# EAGLE board UsbParMarkerV3 v22 (EAGLE 9.7.0)
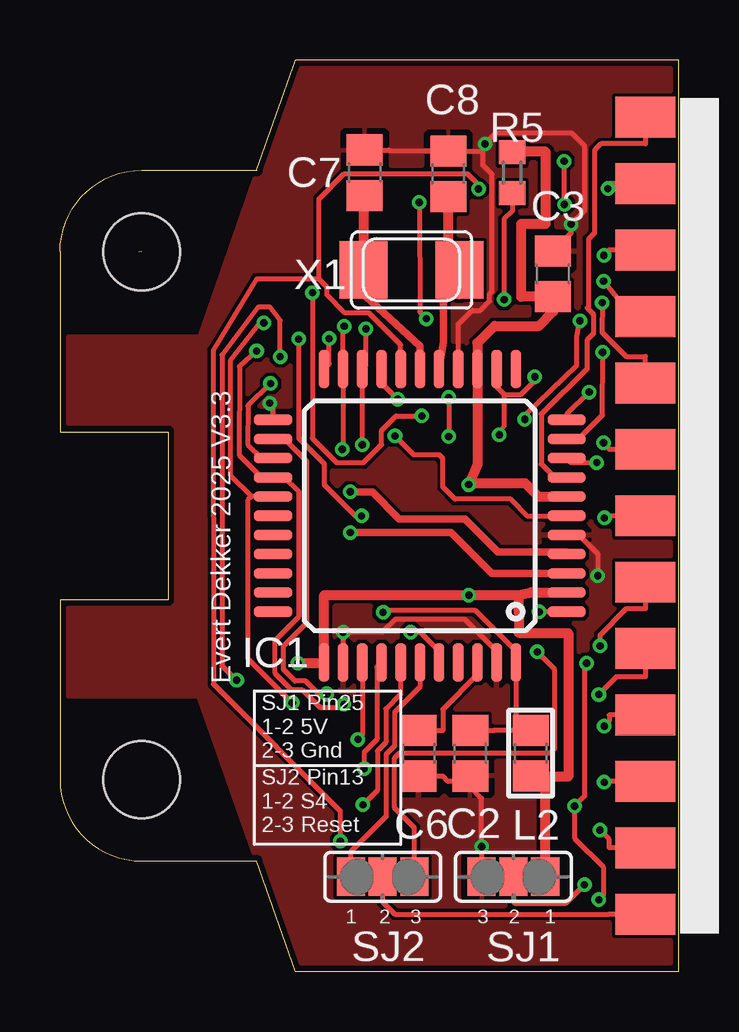
[diagram p0: board, top side]
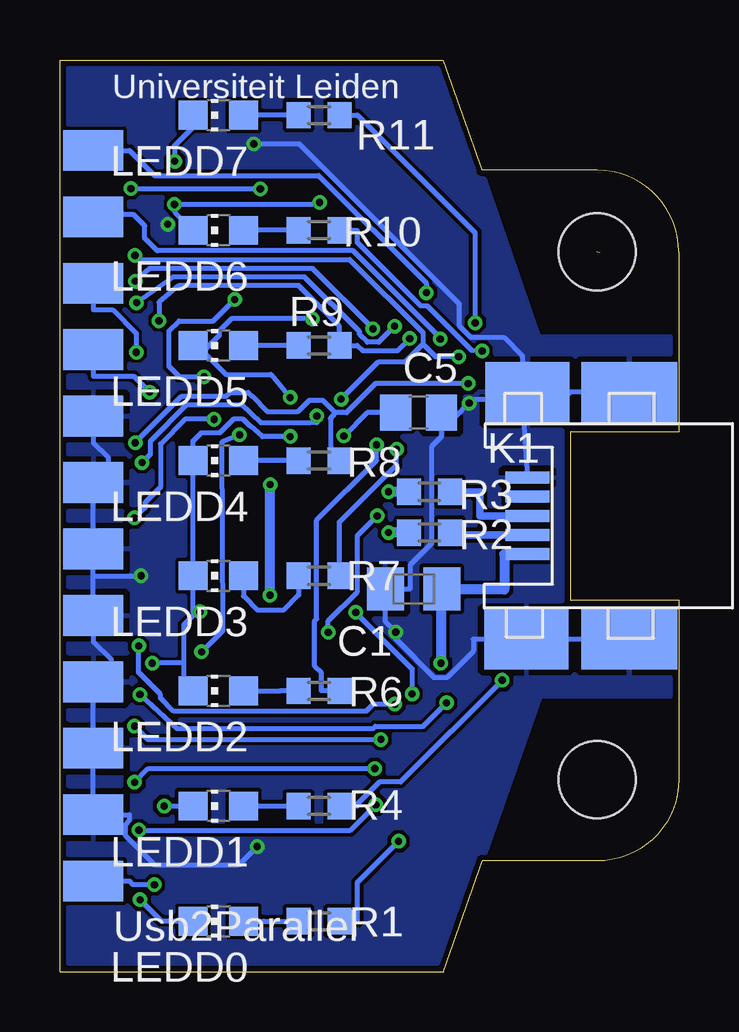
[diagram p1: board, bottom side, seen from below]

Size 25.8 x 38 mm. Coordinates in mm from the lower left corner, seen from the top.
Outline: 9.81,0 25.8,0 25.8,38 9.81,38 8.2,33.41
Outline: 9.81,0 9.8,0
Outline: 3.41,30 3.29,30
Outline: 8.2,33.41 3.41,33.41 arc90 0,30 0,22.5 4.52,22.5 4.52,15.5 0,15.5 0,11.5 0,11.5 0,8.01 arc90 3.4,4.61 8.2,4.61 9.81,0
Outline: 8.2,33.41 8.21,33.41
Copper layers (1*16): Top / Bottom
Stack-up Default Layer Stack: Top User Defined 0.035mm / Dielectric-1 User Defined 1.6mm / Bottom User Defined 0.035mm
Design rules: minimum copper width class=1 14mil, minimum copper width class=2 12mil, minimum copper width class=0 8mil, minimum copper width 6mil, minimum drill size 0.299996875mm, copper clearance class=1 to class=1 8mil, copper clearance class=2 to class=2 8mil, copper clearance via to via 8mil, copper clearance wire_polygon to wire_polygon 6mil, copper clearance wire_polygon to pad_smd 6mil, copper clearance wire_polygon to via 6mil, copper clearance pad_smd to pad_smd 6mil, copper clearance pad_smd to via 6mil, copper clearance smd to pad (same net) 0mil, copper clearance smd to via (same net) 0mil, copper clearance smd to smd (same net) 0mil, dimension clearance 10mil, via restrict clearance 0mil, drill distance 10mil, keepout clearance 0mil
Net classes: 0 default: width 0.203 mm; 1 RowCols: width 0.356 mm, clearance 0.203 mm; 2 Vcc: width 0.305 mm, clearance 0.203 mm
Holes 3.2 mm at 3.41,8 3.41,30

## Footprints (pad centres in the part's own frame; a part is rotated, then mirrored left to right if it is on the bottom)
R/2012-12R = smd 1.55 x 1.8: + 1.175,0; - -1.175,0
C0805 = smd 1.3 x 1.5: 1 -0.95,0; 2 0.95,0
TQFP44-PAD = smd 1.6 x 0.45: 1 -6.117,4; 2 -6.117,3.2; 3 -6.117,2.4; 4 -6.117,1.6; 5 -6.117,0.8; 6 -6.117,0; 7 -6.117,-0.8; 8 -6.117,-1.6; 9 -6.117,-2.4; 10 -6.117,-3.2; 11 -6.117,-4; 23 6.117,-4; 24 6.117,-3.2; 25 6.117,-2.4; 26 6.117,-1.6; 27 6.117,-0.8; 28 6.117,0; 29 6.117,0.8; 30 6.117,1.6; 31 6.117,2.4; 32 6.117,3.2; 33 6.117,4 | smd 0.45 x 1.6: 12 -4,-6.117; 13 -3.2,-6.117; 14 -2.4,-6.117; 15 -1.6,-6.117; 16 -0.8,-6.117; 17 0,-6.117; 18 0.8,-6.117; 19 1.6,-6.117; 20 2.4,-6.117; 21 3.2,-6.117; 22 4,-6.117; 34 4,6.117; 35 3.2,6.117; 36 2.4,6.117; 37 1.6,6.117; 38 0.8,6.117; 39 0,6.117; 40 -0.8,6.117; 41 -1.6,6.117; 42 -2.4,6.117; 43 -3.2,6.117; 44 -4,6.117
MINIUSB = smd 0.5 x 1.85: 1 -1.6,3.81; 2 -0.8,3.81; 3 0,3.81; 4 0.8,3.81; 5 1.6,3.81 | smd 2.5 x 3.5: 11 -5.15,3.86; 13 5.15,3.81 | smd 2.5 x 4: 12 -5.15,-0.44; 14 5.15,-0.44
F25K = smd 1.7 x 2.5: 1 -16.612,-1.75; 2 -13.843,-1.75; 3 -11.074,-1.75; 4 -8.306,-1.75; 5 -5.537,-1.75; 6 -2.769,-1.75; 7 0,-1.75; 8 2.769,-1.75; 9 5.537,-1.75; 10 8.306,-1.75; 11 11.074,-1.75; 12 13.843,-1.75; 13 16.612,-1.75 | smd 1.7 x 2.5 bottom: 14 -15.227,-1.75; 15 -12.459,-1.75; 16 -9.69,-1.75; 17 -6.921,-1.75; 18 -4.153,-1.75; 19 -1.384,-1.75; 20 1.384,-1.75; 21 4.153,-1.75; 22 6.921,-1.75; 23 9.69,-1.75; 24 12.459,-1.75; 25 15.227,-1.75
0805 = smd 1.3 x 1.5: 1 -0.95,0; 2 0.95,0
CHIP-LED0805 = smd 1.2 x 1.2: A 0,-1.05; C 0,1.05
R0603 = smd 1 x 1.1: 1 -0.85,0; 2 0.85,0
SJ3P = smd 1.168 x 1.6: 1 -1.324,0; 2 0,0; 3 1.324,0
NX5032 = smd 2 x 2.4: P$1 2,0; P$2 -2,0

## Placement (x,y rotation side)
C1  10uF  [R/2012-12R]  11.05,15.95 0 bottom
C2  100N  [C0805]  17.11,9.1 270 top
C3  100n  [C0805]  20.56,29.08 270 top
C5  1uF  [C0805]  10.86,23.3 0 bottom
C6  100N  [C0805]  14.96,9.1 270 top
C7  22p  [C0805]  12.71,33.3 90 top
C8  22p  [C0805]  16.19,33.25 90 top
IC1  ATMEGA32U4-XUAU  [TQFP44-PAD]  15,19 180 top
K1  USBMINIB  [MINIUSB]  2.5,19 90 bottom
K2  F25K  [F25K]  26.16,19 270 top
L2  10uH  [0805]  19.63,9.11 270 top
LEDD0  KPTD-2012LVZGCK  [CHIP-LED0805]  19.2,2.1 90 bottom
LEDD1  KPTD-2012LVZGCK  [CHIP-LED0805]  19.2,6.9 90 bottom
LEDD2  KPTD-2012LVZGCK  [CHIP-LED0805]  19.2,11.7 90 bottom
LEDD3  KPTD-2012LVZGCK  [CHIP-LED0805]  19.2,16.5 90 bottom
LEDD4  KPTD-2012LVZGCK  [CHIP-LED0805]  19.2,21.3 90 bottom
LEDD5  KPTD-2012LVZGCK  [CHIP-LED0805]  19.2,26.1 90 bottom
LEDD6  KPTD-2012LVZGCK  [CHIP-LED0805]  19.2,30.9 90 bottom
LEDD7  KPTD-2012LVZGCK  [CHIP-LED0805]  19.2,35.7 90 bottom
R1  2K2  [R0603]  15,2.1 180 bottom
R2  22  [R0603]  10.4,18.3 180 bottom
R3  22  [R0603]  10.4,20 180 bottom
R4  2K2  [R0603]  15,6.9 180 bottom
R5  10K  [R0603]  18.86,33.3 90 top
R6  2K2  [R0603]  15,11.7 180 bottom
R7  2K2  [R0603]  15,16.5 180 bottom
R8  2K2  [R0603]  15,21.3 180 bottom
R9  2K2  [R0603]  15,26.1 180 bottom
R10  2K2  [R0603]  15,30.9 180 bottom
R11  2K2  [R0603]  15,35.7 180 bottom
SJ1  [SJ3P]  18.91,3.95 180 top
SJ2  [SJ3P]  13.46,3.95 0 top
X1  16Mhz  [NX5032]  14.65,29.25 180 top

## Library data of the parts
C1-C3 C5 C6 = rcl; SPICEPREFIX: C
C7 C8 = rcl; FARNELL: 1759489; SPICEPREFIX: C
IC1 = SmartPrj; RS: 715-3805
K1 = Mini_usb; LCSC: SOFNG CZ-519
K2 SJ1 SJ2 = hs-ul
L2 = microbuilder; FARNELL: 2215650
LEDD0 LEDD1-LEDD7 = LedKingbright; FARNELL: 2846598
R1-R11 = rcl; SPICEPREFIX: R
X1 = adafruit; FARNELL: 2467791

## Nets
+5V [Vcc]: C1.+ C3.2 IC1.2 IC1.7 IC1.14 IC1.34 K1.1 L2.2 R5.2 SJ1.1
D0: IC1.18 K2.2 R1.1
D1: IC1.19 K2.3 R4.1
D2: IC1.20 K2.4 R6.1
D3: IC1.21 K2.5 R7.1
D4: IC1.25 K2.6 R8.1
D5: IC1.22 K2.7 R9.1
D6: IC1.26 K2.8 R10.1
D7: IC1.27 K2.9 R11.1
GND: C1.- C2.2 C3.1 C5.2 C6.2 C7.2 C8.2 IC1.5 IC1.15 IC1.23 IC1.35 IC1.43 K1.5 K1.11 K1.12 K1.13 K1.14 K2.18 K2.19 K2.20 K2.21 K2.22 K2.23 K2.24 SJ1.3
LEDCC: IC1.1 LEDD0.C LEDD1.C LEDD2.C LEDD3.C LEDD4.C LEDD5.C LEDD6.C LEDD7.C
N$1: K1.2 R2.1
N$2: K1.3 R3.1
N$3: K2.13 SJ2.2
N$4: IC1.36 K2.10
N$6: C2.1 IC1.24 IC1.44 L2.1
N$7: LEDD0.A R1.2
N$8: LEDD1.A R4.2
N$16: IC1.8 K2.1
N$17: IC1.39 SJ2.1
N$18: IC1.38 K2.12
N$19: IC1.37 K2.11
N$20: LEDD2.A R6.2
N$21: IC1.9 K2.14
N$22: IC1.10 K2.16
N$23: IC1.11 K2.17
N$24: IC1.40 K2.15
N$25: K2.25 SJ1.2
N$26: LEDD3.A R7.2
N$27: LEDD4.A R8.2
N$28: LEDD5.A R9.2
N$29: LEDD6.A R10.2
N$30: LEDD7.A R11.2
N$44: IC1.3 R2.2
N$46: IC1.4 R3.2
N$48: C6.1 IC1.42
N$49: C8.1 IC1.16 X1.P$2
N$50: C5.1 IC1.6
N$51: C7.1 IC1.17 X1.P$1
RESET: IC1.13 R5.1 SJ2.3

## Tracks (layer width: path | path; a pad name or v marks a point on that pad's centre or on a via)
+5V  (via drill 0.3 pad 0.6)
  Top 0.406: R5.2 18.86,34.17 20.26,34.17 20.26,31.17 19.23,31.17 19.23,28.14 C3.2 20.55,27.5 19.97,26.91 18.11,26.91 17.41,26.2 IC1.14 17.41,21.1 17.4,21.1 17.09,20.36 | 17.09,20.36 19.39,20.36 19.95,19.8 IC1.7 | v17.04,20.3 17.09,20.36 | SJ1.1 20.23,8.15 L2.2 19.63,8.12 21.2,8.12 21.2,14.11 19.13,14.12 19.12,15.69 | 19.12,15.69 19.64,15.81 21.11,15.81 IC1.2 | 19.12,15.69 v17.05,15.69 11.02,15.69 IC1.34 11,12.86 v9.92,12.86
  Bottom 0.406: v17.05,15.69 v17.04,20.3 | v9.92,12.86 9.92,15.95 C1.+ 9.88,15.92 7.28,15.92 7.28,17.4 K1.1
D0  (via drill 0.3 pad 0.6)
  Top 0.203: IC1.18 14.21,26.13 12.88,27.46 11.89,27.46 11.13,28.22 11.13,28.53 10.81,28.87 | 10.81,28.87 10.8,32.2 11.85,33.25 17,33.25 17.45,32.8 v17.45,32.62 | 10.81,28.87 8.2,28.86 6.4,25.89 6.4,11.98 11.69,6.7 v11.69,5.43 | v22.85,32.64 22.89,32.82 22.91,32.84 K2.2
  Bottom 0.203: v17.45,32.62 22.5,32.62 v22.85,32.64 | R1.1 13.4,2.1 13.4,3.72 v11.69,5.43
D1  (via drill 0.3 pad 0.6)
  Top 0.203: v9.18,25.63 9.18,27.15 8.77,27.69 8.27,27.7 6.75,25.7 6.76,12.75 v7.36,12.14 | v14.08,23.86 13.4,24.54 IC1.19 | v22.68,29.85 22.91,30.07 K2.3
  Bottom 0.203: v7.36,12.14 11.6,7.9 12.48,7.9 13.4,6.98 13.4,6.9 R4.1 | v22.68,29.85 22.52,29.68 13.72,29.68 10.66,26.63 10.66,26.15 | v9.18,25.63 10.14,25.63 10.66,26.15 | 10.66,26.15 11.41,25.41 12.54,25.41 v14.08,23.86
D2  (via drill 0.3 pad 0.6)
  Top 0.203: v12.76,26.79 12.76,25.27 IC1.20 v12.61,21.95 | v22.67,28.78 23.87,27.31 K2.4
  Bottom 0.203: v12.76,26.79 15.27,29.31 22.07,29.31 v22.67,28.78 | R6.1 14.91,11.7 14.91,12.45 15.18,12.72 15.18,14.62 15.1,14.7 15.1,18.82 12.61,21.31 v12.61,21.95
D3  (via drill 0.3 pad 0.6)
  Top 0.203: v11.77,21.77 11.8,21.8 IC1.21 11.8,26.85 v11.85,26.9 | v22.61,27.88 22.6,26.65 23.61,25.64 24.41,25.64 K2.5
  Bottom 0.203: v11.85,26.9 12.52,26.24 12.99,26.24 13.31,26.56 13.31,26.67 15.6,28.96 21.1,28.96 v22.61,27.88 | R7.1 14.15,18.74 11.77,21.12 v11.77,21.77
D4  (via drill 0.3 pad 0.6)
  Top 0.203: v22.67,22.04 22.91,21.8 22.91,21.77 K2.6 | v8.78,24.52 7.84,23.59 7.83,21.97 8.4,21.4 IC1.25
  Bottom 0.203: v22.67,22.04 | v22.67,22.04 20.73,23.98 18.87,23.98 18.72,24.14 17.96,24.14 17.8,23.98 17.17,23.34 15.87,23.34 15.4,23.82 14.85,23.82 14.34,23.3 | R8.1 14.53,21.68 14.53,23.07 14.37,23.23 14.34,23.3 | v8.78,24.52 12.64,24.52 13.86,23.29 14.34,23.3
D5  (via drill 0.3 pad 0.6)
  Top 0.203: v19.38,23.02 19.39,23.2 21.55,25.28 21.55,26.47 v21.68,27.13 | K2.7 22.8,19 v22.7,18.91 | IC1.22 11.22,25.33 v11.22,26.39
  Bottom 0.203: v21.68,27.13 21.67,27.91 20.85,28.59 15.85,28.6 14.15,26.9 R9.1 13.4,26.1 13.18,25.88 11.73,25.88 v11.22,26.39 | v19.38,23.02 20.59,23.02 21.61,22 21.61,20.2 22.26,19.55 22.26,19.32 22.3,19.32 v22.7,18.91
D6  (via drill 0.3 pad 0.6)
  Top 0.203: v11.84,11.14 11.71,11.01 10.84,11.01 10.09,11.76 9.64,11.76 8.95,12.45 8.95,13.79 9.94,14.78 9.94,20.02 9.37,20.6 IC1.26 8.41,20.6 7.47,21.53 7.48,25.23 v8.2,25.87 | v22.52,13.58 22.52,14.04 23.61,15.13 24.41,15.13 K2.8
  Bottom 0.203: v11.84,11.14 12.75,11.14 13.04,10.85 21.06,10.85 21.61,11.4 21.61,11.55 22.52,12.46 v22.52,13.57 v22.52,13.58 | v8.2,25.87 8.64,25.89 10.49,27.74 10.76,27.74 13.4,30.38 13.4,30.9 R10.1
D7  (via drill 0.3 pad 0.6)
  Top 0.203: 7.98,19.8 7.83,19.65 7.83,13.06 v9.69,11.2 | K2.9 24.41,12.28 23.19,12.28 v22.47,11.55 | IC1.27 7.98,19.8 | 7.98,19.8 7.11,20.67 7.12,25.49 8.33,27.05 v8.5,27.05
  Bottom 0.203: v22.47,11.55 20.92,10.13 12.75,10.13 12.65,10.23 10.66,10.23 v9.69,11.2 | R11.1 13.4,35.7 8.5,30.8 v8.5,27.05
GND  (via drill 0.3 pad 0.6)
  Top 0.203: 17.63,34.2 17.63,34.41 v17.72,34.5 18.18,34.96 21.34,34.96 21.86,34.43 21.86,31.71 v21.31,31.15 21.31,30.79 C3.1 | IC1.15 16.61,26.98 17.18,27.56 17.53,27.56 17.91,27.94 17.91,28.24 18.01,28.34 18.01,33.23 17.63,33.61 17.63,34.2 | 17.63,34.2 C8.2 13.76,34.2 13.71,34.25 C7.2 | IC1.5 21.6,18.23 22.42,17.41 v22.42,16.5 | IC1.43 18.2,13.37 16.87,14.7 13.98,14.7 13.44,14.15 v11.8,14.15 IC1.35 | C6.2 15.96,8.15 16.19,7.92 17.11,7.92 | 17.11,7.92 17.11,7.7 17.58,7.22 v17.58,5.21 SJ1.3 | C2.2 17.11,7.92 | IC1.23 8.89,23.55 v8.75,23.69
  Bottom 0.203: v17.72,34.5 15.83,34.5 9.17,27.84 9.17,26.93 8.68,26.44 7.3,26.44 6.52,25.65 K1.13 6.52,23.85 | K2.18 24.41,22.05 23.8,21.44 23.8,20.66 24.07,20.38 K2.19 K2.20 24.41,16.5 | 24.41,16.5 v22.42,16.5 | 24.41,16.5 K2.21 24.41,13.74 23.66,12.99 23.66,12.08 K2.22 K2.23 K2.24 22.91,6.54 22.91,6.29 23.07,6.12 23.07,5.66 21.84,4.43 18.36,4.43 v17.58,5.21 | 9.9,23.12 9.32,23.12 v8.75,23.69 8.59,23.85 6.52,23.85 | 9.9,23.12 9.9,22.3 10.31,21.89 10.31,17.84 11.2,16.94 11.2,15.95 C1.- 12.23,14.57 v11.8,14.15 11.8,13.86 10.19,12.25 9.67,12.25 8.57,13.35 8.57,13.85 K1.11 K1.12 | C5.2 9.9,23.12 | 6.52,23.69 4.98,23.69 4.52,24.15 K1.14 | 6.52,23.69 K1.5 | 6.52,23.85 6.52,23.69
  pour Top: 25.86,38.07 9.75,38.06 5.79,26.58 -0.29,26.56 -0.29,11.38 5.72,11.39 9.75,-0.1 25.89,-0.12
  pour Bottom: 25.86,38.07 9.75,38.06 5.79,26.58 -0.29,26.56 -0.29,11.38 5.72,11.39 9.75,-0.1 25.89,-0.12
LEDCC  (via drill 0.3)
  Top 0.203: IC1.1 v19.98,14.99 | v21.95,12.85 21.86,12.85 21.86,7.31 v21.45,6.9 21.45,5.55 22.65,4.36 22.65,3.17 v22.46,2.99 | v16.21,23.93 v16.21,22.3 | v21.02,33.78 21.02,31.88 v21.04,31.98 | v14.98,32.06 15,27.5 v15.28,27.21
  Bottom 0.203: 20.64,12.86 20.64,14.45 20.1,14.99 v19.98,14.99 20.25,15 LEDD3.C LEDD4.C 20.25,22.12 19.93,22.45 19.14,22.45 19.01,22.59 18.57,23.02 18.16,23.02 17.87,22.73 17.85,22.73 17.37,22.3 v16.21,22.3 | 20.64,12.86 20.64,12.09 LEDD2.C | 20.64,12.86 21.86,12.86 v21.95,12.85 | v21.45,6.9 LEDD1.C | v22.46,2.99 21.59,2.12 20.27,2.12 LEDD0.C | LEDD5.C 20.09,26.1 19.84,25.84 | 19.84,25.84 18.88,24.89 17.01,24.89 v16.21,23.93 | LEDD7.C 20.25,35.2 21.03,34.43 21.03,33.79 v21.02,33.78 | LEDD6.C 21.02,31.66 v21.04,31.98 15.1,31.98 v14.98,32.06 | v15.28,27.21 18.65,27.21 19.16,26.7 19.16,26.52 19.84,25.84
N$1
  Bottom 0.305: K1.2 9.55,18.2
  Bottom 0.406: 9.55,18.2 R2.1
N$2
  Bottom 0.305: R3.1 8.3,20 8.3,19 K1.3
N$3
  Top 0.203: SJ2.2 13.46,2.9 13.96,2.39 22.91,2.39 K2.13
N$4  (via drill 0.3 pad 0.6)
  Top 0.203: IC1.36 12.61,9.86 v12.42,9.67 | v22.69,10.23 22.91,10.44 22.91,10.69 K2.10
  Bottom 0.203: v22.69,10.23 22.14,9.67 v12.42,9.67
N$6  (via drill 0.3 pad 0.6)
  Top 0.203: 19,10.05 18.11,10.05 C2.1 | L2.1 19,10.05 | 19,10.05 IC1.44 19,13.36 17.31,15.05 13.55,15.05 v13.47,14.97 | v11.12,11.57 10.78,11.57 10.24,12.12 9.8,12.12 9.31,12.6 9.31,13.56 10.3,14.55 10.3,21.27 9.37,22.2 IC1.24
  Bottom 0.203: v13.47,14.97 11.12,12.62 v11.12,11.57
N$7
  Bottom 0.203: LEDD0.A 17.3,2.1 R1.2
N$8
  Bottom 0.203: LEDD1.A R4.2
N$16
  Top 0.203: IC1.8 20.65,20.6 20.06,21.16 20.06,23.25 21.98,25.13 21.98,25.14 21.98,26.32 22.25,26.59 22.25,27.4 21.98,27.67 22.04,27.72 22.04,30.52 22.29,30.77 22.29,34.23 22.33,34.27 22.33,34.28 22.56,34.51 24.41,34.51 K2.1
N$17
  Top 0.203: IC1.39 15,11.86 13.95,10.81 13.95,9.41 13.59,9.05 13.59,6.47 12.13,5 SJ2.1
N$18  (via drill 0.3 pad 0.6)
  Top 0.203: IC1.38 14.21,11.56 13.59,10.95 13.59,9.55 13.24,9.2 13.24,7.56 v12.63,6.95 | K2.12 22.91,5.16 22.91,5.5 v22.52,5.89
  Bottom 0.203: v22.52,5.89 13.69,5.89 v12.63,6.95
N$19  (via drill 0.3 pad 0.6)
  Top 0.203: IC1.37 13.21,12.69 13.21,9.68 12.68,9.14 v12.68,8.46 | K2.11 22.73,7.93 v22.69,7.89
  Bottom 0.203: v22.69,7.89 22.12,8.46 v12.68,8.46
N$20
  Bottom 0.203: R6.2 16.61,11.7 LEDD2.A
N$21  (via drill 0.3 pad 0.6)
  Top 0.203: v10.53,28.3 10.53,22.23 11.54,21.21 12.66,21.21 13.41,21.97 13.41,22.56 14.01,23.16 v15.09,23.16 | IC1.9 21.31,21.21 v22.38,21.21
  Bottom 0.203: v10.53,28.3 10.53,28.69 15.02,33.19 21.86,33.19 22.91,34.23 K2.14 | v22.38,21.21 22.04,21.56 22.04,22.1 20.51,23.63 18.73,23.63 18.22,23.63 17.43,22.88 15.38,22.88 15.09,22.88 v15.09,23.16
N$22  (via drill 0.3 pad 0.6)
  Top 0.203: IC1.10 21.59,22.17 22.62,23.2 v22.63,25.81
  Bottom 0.203: v22.63,25.81 22.63,26.6 23.61,27.59 24.41,27.59 K2.16
N$23  (via drill 0.3 pad 0.6)
  Top 0.203: v22.07,24.16 21.12,23.21 IC1.11
  Bottom 0.203: K2.17 24.41,24.82 22.73,24.82 v22.07,24.16
N$24  (via drill 0.3 pad 0.6)
  Top 0.203: v9.95,26.37 9.95,22.23 11.01,21.17 11.01,20.3 12.32,18.99 v12.58,18.99 | IC1.40 15.8,13.36 15.03,14.14 v14.62,14.14
  Bottom 0.203: v9.95,26.37 9.95,26.42 13.58,30.05 21.75,30.05 22.27,30.57 22.27,31.09 22.73,31.55 24.32,31.55 K2.15 | v14.62,14.14 14.62,14.61 13.4,15.83 13.4,18.17 v12.58,18.99
N$25  (via drill 0.3 pad 0.6)
  Top 0.203: SJ1.2 18.91,2.9 18.96,2.85 21.09,2.85 v21.87,3.62
  Bottom 0.203: K2.25 22.91,3.77 22.75,3.62 v21.87,3.62
N$26
  Bottom 0.203: LEDD3.A 18.16,15.65 17.59,15.08 16.47,15.08 15.86,15.7 R7.2
N$27
  Bottom 0.203: R8.2 LEDD4.A
N$28
  Bottom 0.203: R9.2 LEDD5.A
N$29
  Bottom 0.203: R10.2 LEDD6.A
N$30
  Bottom 0.203: R11.2 16.61,35.7 LEDD7.A
N$44  (via drill 0.3 pad 0.6)
  Top 0.305: v12.11,18.3 16.3,18.3 17.3,17.3 18,16.6 IC1.3
  Bottom 0.406: R2.2 v12.11,18.3
N$46  (via drill 0.3 pad 0.6)
  Top 0.305: IC1.4 21.12,17.5 18.27,17.5 16.89,18.87 14.14,18.87 13.03,19.98 12.12,19.98 v12.11,20
  Bottom 0.406: R3.2 v12.11,20
N$48
  Top 0.203: C6.1 15.96,10.05 15.96,10.93 17.41,12.38 IC1.42
N$49
  Top 0.305: IC1.16 15.99,26.23 15.99,28.23 16.66,28.23
  Top 0.406: C8.1 16.19,29.25 X1.P$2 16.66,28.23
N$50  (via drill 0.3 pad 0.6)
  Top 0.203: IC1.6 19.47,19 18.82,19.65 18.82,19.66 18.8,19.69 16.48,19.69 15.96,20.2 15.96,21.39 15.82,21.54 14.76,21.54 v13.97,22.32
  Bottom 0.203: C5.1 12.99,23.3 v13.97,22.32
N$51
  Top 0.305: 12.75,29.25 12.75,28.14 15,26.07 IC1.17
  Top 0.406: 12.75,29.25 X1.P$1 12.65,32.35 C7.1
RESET  (via drill 0.3 pad 0.6)
  Top 0.203: 18.53,24.06 19.23,24.06 19.8,24.63 v19.8,24.79 | IC1.13 18.2,24.38 18.53,24.06 | v18.32,22.38 18.53,22.75 18.53,24.06 | SJ2.3 14.78,5.99 13.95,6.82 13.95,8.9 14.16,9.11 20.45,9.11 20.63,9.29 20.63,12.59 v19.9,13.32 | v18.52,28.02 18.52,31.36 18.86,31.7 R5.1
  Bottom 0.203: v19.9,13.32 19.01,14.22 19.04,22.09 v18.32,22.38 | v18.52,28.02 19.41,27.12 20.84,27.12 21.26,26.71 21.26,25.23 20.84,24.8 19.81,24.8 v19.8,24.79

## Text on the board
tPlace: Evert Dekker 2025 V3.3
bPlace: Universiteit Leiden | Usb2Parallel
tNames: SJ1 Pin25 / 1-2 5V / 2-3 Gnd | SJ2 Pin13 / 1-2 S4 / 2-3 Reset | 1 | 2 | 3 | 3 | 2 | 1